# Altium PCB HDR_PATCH_00.PcbDoc
Units mm, origin at the board's own origin, x right, y up, seen from the top; angles counter-clockwise.
Board outline 50 x 50 mm, 2 copper layers (Top Layer, Bottom Layer); 3 components, 0 nets, 785 pads, 0 vias.
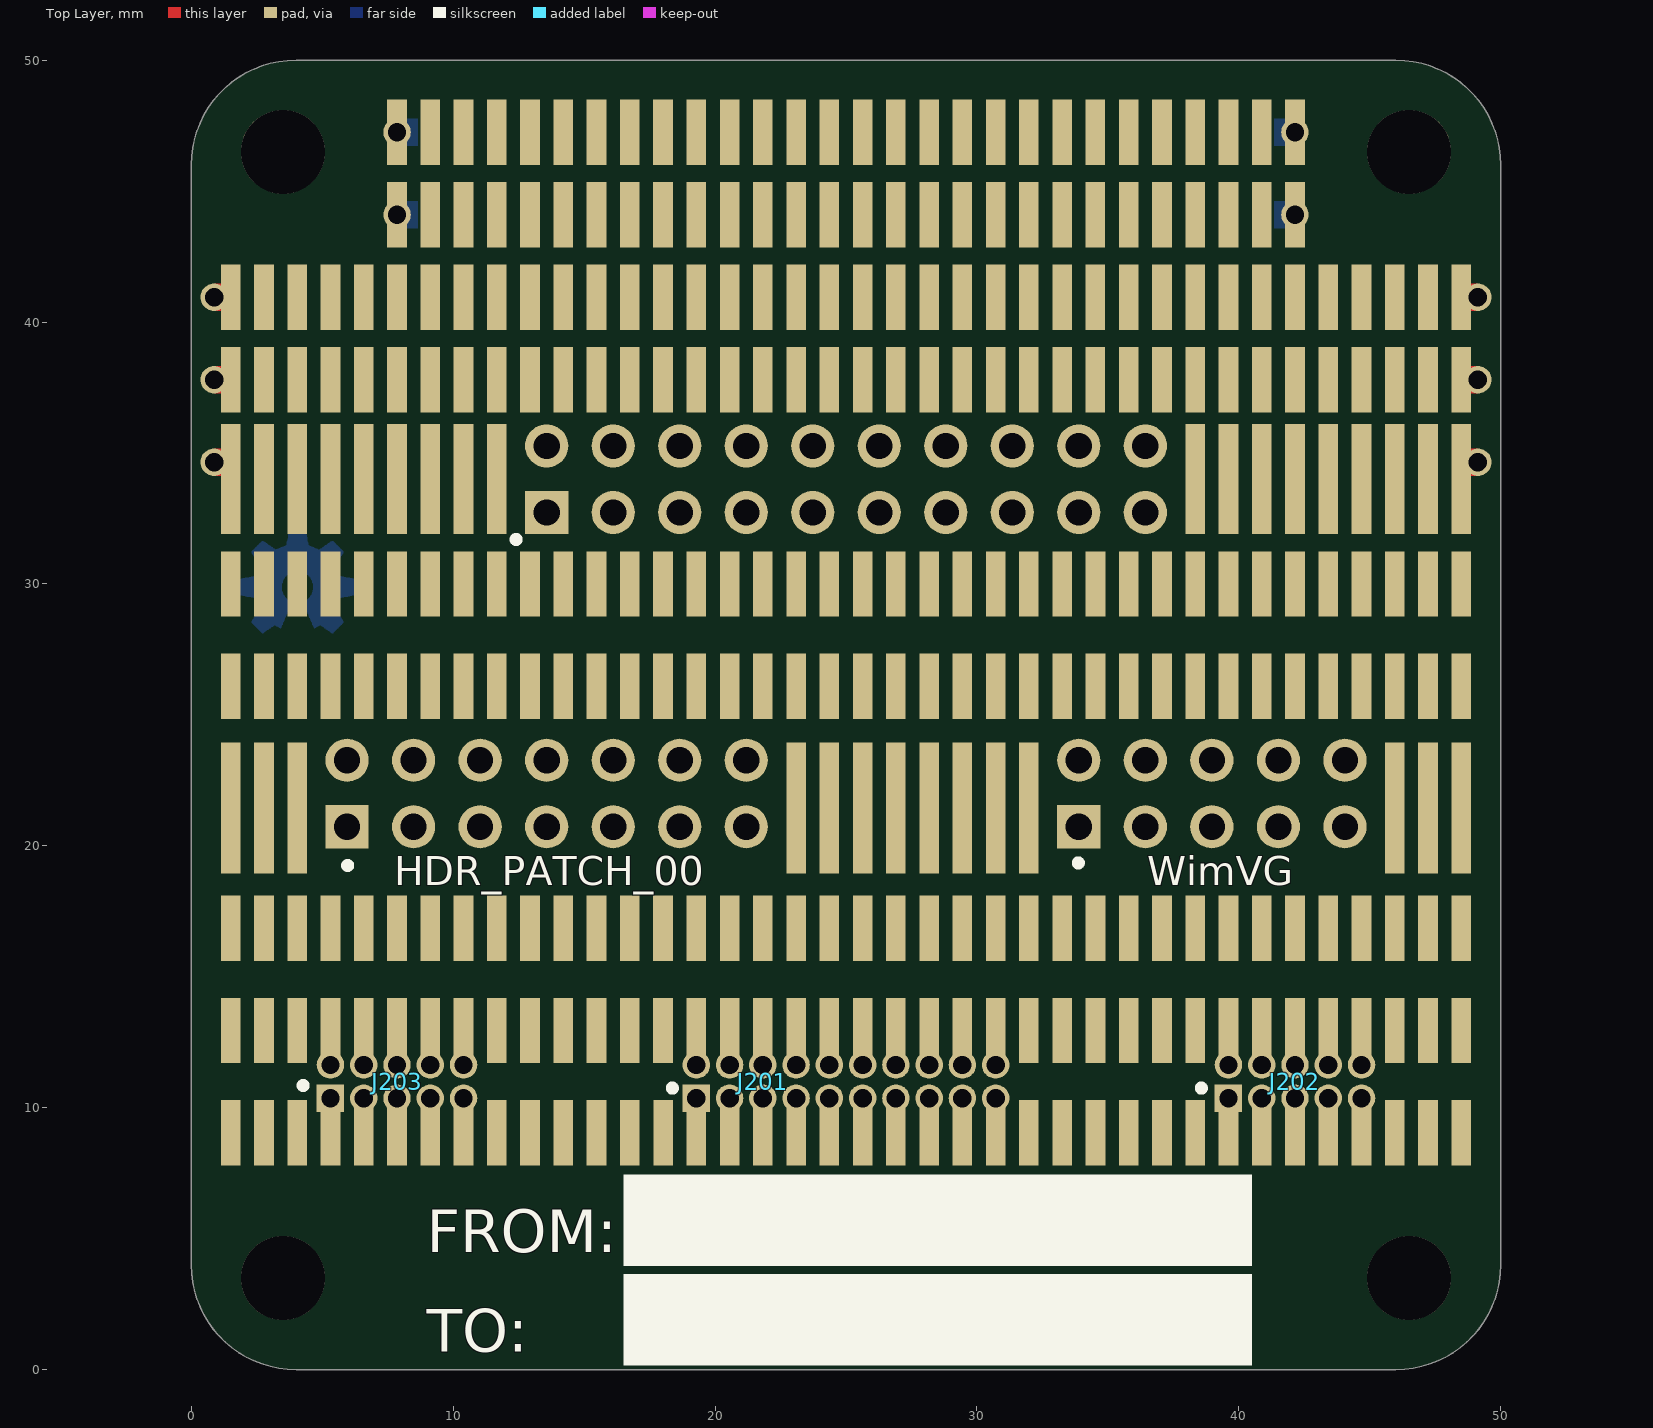
[diagram p0: Top Layer view]
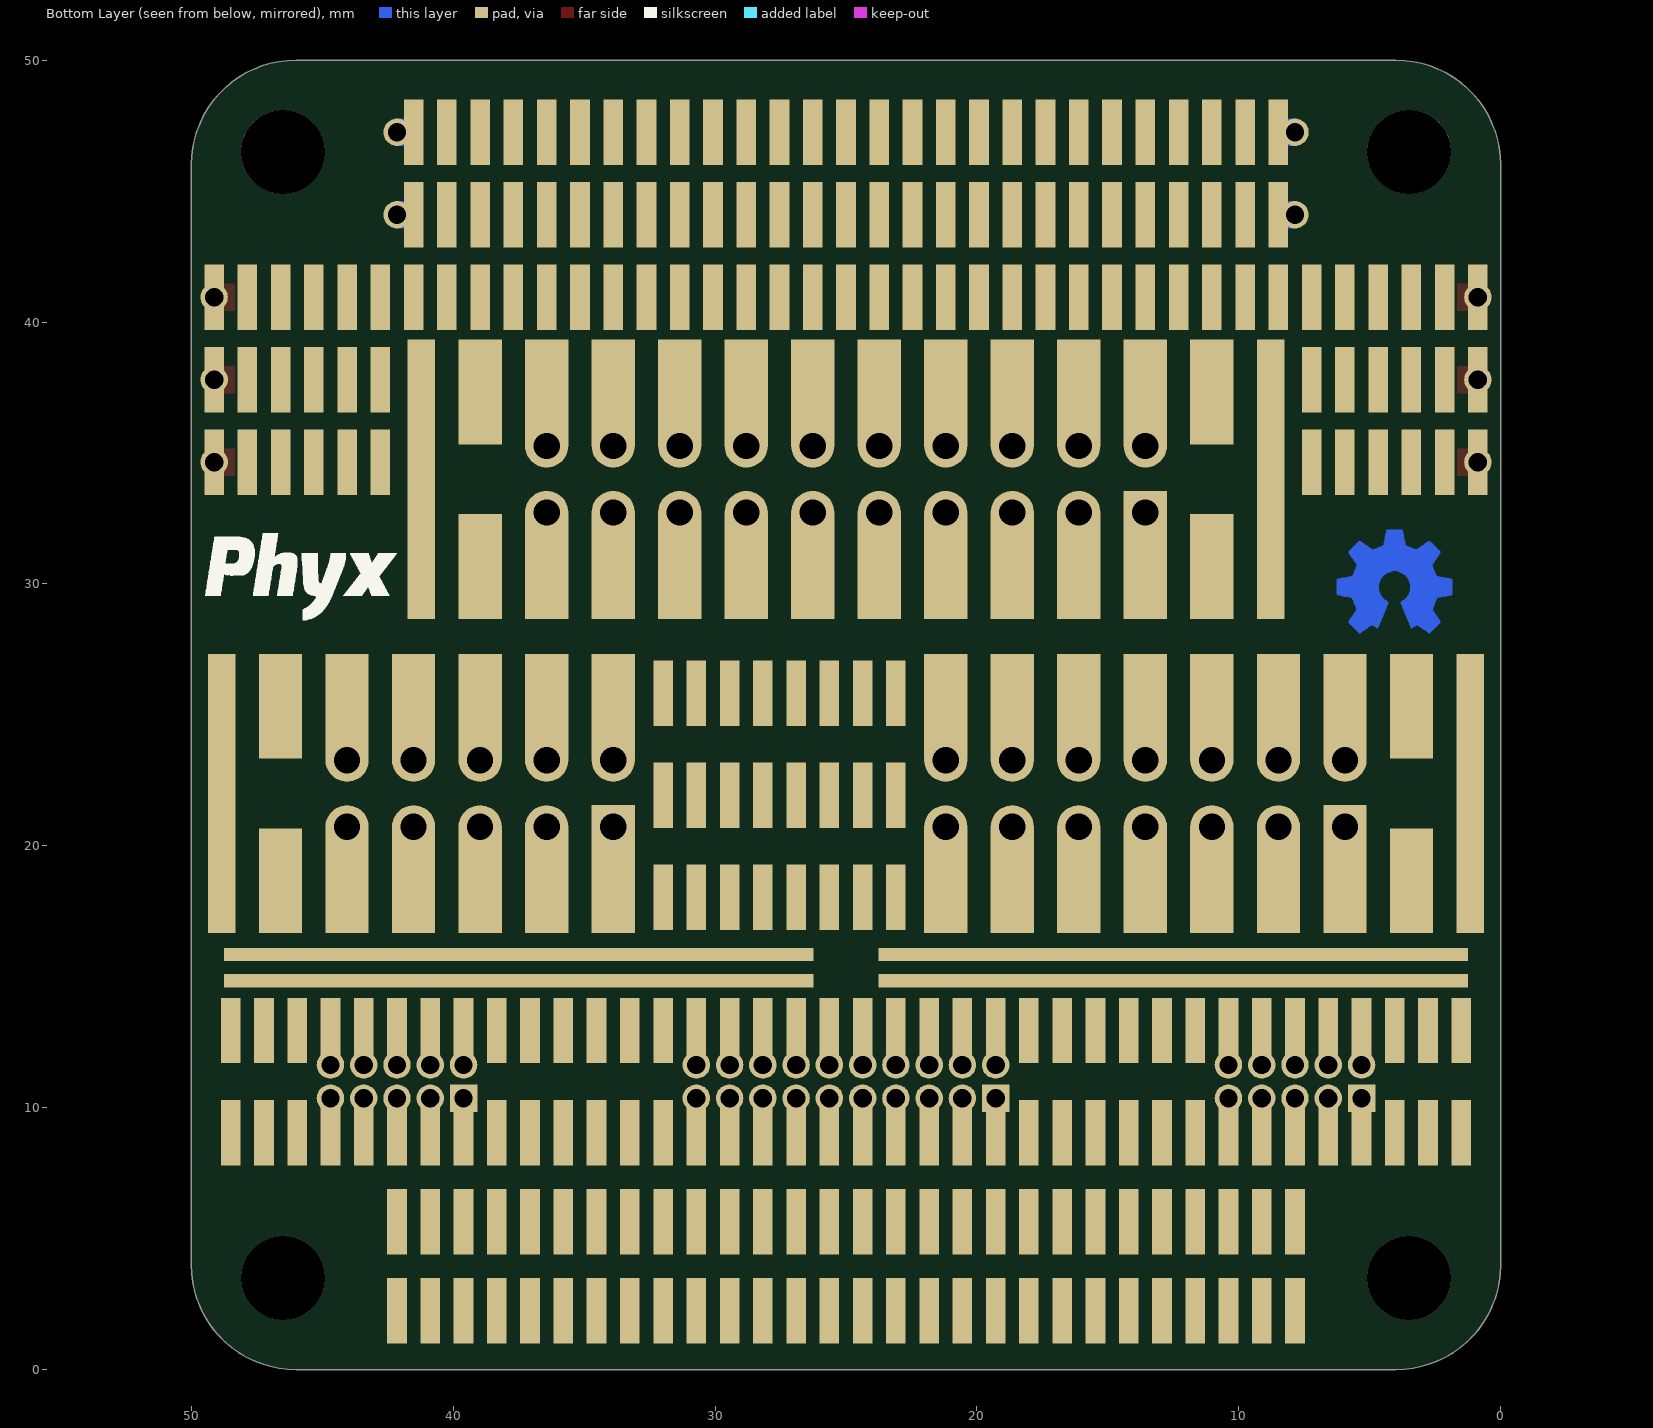
[diagram p1: Bottom Layer view, seen from below]

## Layer stack, top to bottom
Top Solder: solder mask 0.0102, Solder Resist, Dk 3.5
Top Layer: signal copper 0.0356
Dielectric1: dielectric 0.32, FR-4, Dk 4.8
Bottom Layer: signal copper 0.0356
Bottom Solder: solder mask 0.0102, Solder Resist, Dk 3.5

## Board outline
0,4 0,46 cw(c4,46) 4,50 46,50 cw(c46,46) 50,46 50,4 cw(c46,4) 46,0 4,0 cw(c4,4)

## Design rules (kind name [scope] priority, off if disabled: settings)
Clearance [All] p1: gap=0.254
PolygonConnect [All] p1: connectstyle=Relief reliefconductorwidth=0.254 reliefentries=4 polygonreliefangle="90 Angle" airgapwidth=0.254
RoutingVias [All] p1: holewidth=0.711 width=1.27 viastyle="Through Hole" minholewidth=0.711 minwidth=1.27 maxholewidth=0.711 maxwidth=1.27
SilkToSolderMaskClearance SilkscreenOverComponentPads [IsPad] p1: minsilkscreentomaskgap=0.254 clearancetoexposedcopper=TRUE
SolderMaskExpansion [All] p1: expansion=0.102
Width [All] p1: maxlimit=0.254 minlimit=0.254 preferedwidth=0.254
29 further rules are at their usual default settings.

## Components (designator, comment, footprint, x,y, rotation, side; value= is the part's Value field where it differs from the comment)
J201 "HDR 2x5 1.27 TH" HDR2X5_1.27 21.825,11 r0 top
J202 "HDR 2x5 1.27 TH" HDR2X5_1.27 42.145,11 r0 top (schematic designator J201)
J203 "HDR 2x5 1.27 TH" HDR2X5_1.27 7.855,11 r0 top (schematic designator J201)

## Footprints (in the part's own frame and the unit in brackets; to place one, negate y for a bottom-side part, rotate by r counter-clockwise, add the part's x,y. Pads: shape width x height; smd on the part's side, far side on the other; paste and mask are expansions set on the pad)
HDR2X5_1.27 [mm] "shrouded 2x5 box header 1.27mm pitch"
  rect 1.05x1.05 hole 0.7 mask+0.05: 1(-2.54,-0.635)
  round 1.05 hole 0.7 mask+0.05: 2(-2.54,0.635) 3(-1.27,-0.635) 4(-1.27,0.635) 5(0,-0.635) 6(0,0.635) 7(1.27,-0.635) 8(1.27,0.635) 9(2.54,-0.635) 10(2.54,0.635)
  body extent -6.32,-2.55 12.7,2.55, height 5.4

## Part data
J201 J202 J203: library part 150612AO003, "Header Male"

## Free pads (board coordinates)
  round 1.05 hole 0.7 paste-5: 0(0.87,40.95) 0(7.856,47.249) 0(7.857,44.1) 0(42.143,47.249) 0(42.143,44.099) 0(49.129,40.95) 1(0.871,37.8) 1(25.635,10.365) 1(25.635,11.635) 1(26.905,10.365) 1(26.905,11.635) 1(28.175,10.365) 1(28.175,11.635) 1(29.445,10.365) 1(29.445,11.635) 1(30.715,10.365) 1(30.715,11.635) 1(49.128,37.8) 2(0.871,34.65) 2(49.128,34.65)
  rect 0.75x2.5 smd far side paste-5: 0(0.871,40.95) 0(0.872,37.8) 0(0.872,34.65) 0(1.505,9.05) 0(1.505,12.95) 0(2.141,40.95) 0(2.142,37.8) 0(2.142,34.65) 0(2.775,9.05) 0(2.775,12.95) 0(3.411,40.95) 0(3.411,37.8) 0(3.412,34.65) 0(4.045,9.05) 0(4.045,12.95) 0(4.681,40.95) 0(4.681,37.8) 0(4.682,34.65) 0(5.315,12.95) 0(5.315,9.05) 0(5.951,40.95) 0(5.951,37.8) 0(5.952,34.65) 0(6.585,12.95) 0(6.585,9.05) 0(7.221,40.95) 0(7.221,37.8) 0(7.222,34.65) 0(7.855,12.95) 0(7.855,9.05) 0(7.855,2.25) 0(7.855,5.65) 0(8.491,47.249) 0(8.491,44.1) 0(8.491,40.95) 0(9.125,12.95) 0(9.125,9.05) 0(9.125,5.65) 0(9.125,2.25) 0(9.761,47.249) 0(9.761,44.1) 0(9.761,40.95) 0(10.395,12.95) 0(10.395,9.05) 0(10.395,5.65) 0(10.395,2.25) 0(11.03,47.249) 0(11.031,44.1) 0(11.031,40.95) 0(11.665,9.05) 0(11.665,5.65) 0(11.665,12.95) 0(11.665,2.25) 0(12.3,47.249) 0(12.3,44.1) 0(12.301,40.95) 0(12.935,9.05) 0(12.935,5.65) 0(12.935,12.95) 0(12.935,2.25) 0(13.57,47.249) 0(13.57,44.1) 0(13.57,40.95) 0(14.205,9.05) 0(14.205,5.65) 0(14.205,12.95) 0(14.205,2.25) 0(14.84,47.249) 0(14.84,44.1) 0(14.841,40.95) 0(15.475,9.05) 0(15.475,5.65) 0(15.475,12.95) 0(15.475,2.25) 0(16.11,47.249) 0(16.11,44.1) 0(16.11,40.95) 0(16.745,9.05) 0(16.745,5.65) 0(16.745,12.95) 0(16.745,2.25) 0(17.38,47.249) 0(17.38,44.1) 0(17.38,40.95) 0(18.015,9.05) 0(18.015,5.65) 0(18.015,12.95) 0(18.015,2.25) 0(18.65,47.249) 0(18.65,44.1) 0(18.65,40.95) 0(19.285,12.95) 0(19.285,9.05) 0(19.285,5.65) 0(19.285,2.25) 0(19.92,47.249) 0(19.92,44.1) 0(19.92,40.95) 0(20.555,12.95) 0(20.555,9.05) 0(20.555,5.65) 0(20.555,2.25) 0(21.19,47.249) 0(21.19,44.1) 0(21.19,40.95) 0(21.825,12.95) 0(21.825,9.05) 0(21.825,5.65) 0(21.825,2.25) 0(22.46,47.249) 0(22.46,44.1) 0(22.46,40.95) 0(23.095,25.83) 0(23.095,21.93) 0(23.095,12.95) 0(23.095,18.03) 0(23.095,9.05) 0(23.095,5.65) 0(23.095,2.25) 0(23.73,47.249) 0(23.73,44.1) 0(23.73,40.95) 0(24.365,25.83) 0(24.365,21.93) 0(24.365,12.95) 0(24.365,18.03) 0(24.365,9.05) 0(24.365,5.65) 0(24.365,2.25) 0(25,47.249) 0(25,44.1) 0(25,40.95) 0(25.635,25.83) 0(25.635,21.93) 0(25.635,12.95) 0(25.635,18.03) 0(25.635,9.05) 0(25.635,5.65) 0(25.635,2.25) 0(26.27,47.249) 0(26.27,44.1) 0(26.27,40.95) 0(26.905,25.83) 0(26.905,21.93) 0(26.905,12.95) 0(26.905,18.03) 0(26.905,9.05) 0(26.905,5.65) 0(26.905,2.25) 0(27.54,47.249) 0(27.54,44.1) 0(27.54,40.95) 0(28.175,25.83) 0(28.175,21.93) 0(28.175,12.95) 0(28.175,18.03) 0(28.175,9.05) 0(28.175,5.65) 0(28.175,2.25) 0(28.81,47.249) 0(28.81,44.1) 0(28.81,40.95) 0(29.445,25.83) 0(29.445,21.93) 0(29.445,12.95) 0(29.445,18.03) 0(29.445,9.05) 0(29.445,5.65) 0(29.445,2.25) 0(30.08,47.249) 0(30.08,44.1) 0(30.08,40.95) 0(30.715,25.83) 0(30.715,21.93) 0(30.715,12.95) 0(30.715,18.03) 0(30.715,9.05) 0(30.715,5.65) 0(30.715,2.25) 0(31.35,47.249) 0(31.35,44.1) 0(31.35,40.95) 0(31.985,12.95) 0(31.985,18.03) 0(31.985,9.05) 0(31.985,5.65) 0(31.985,25.83) 0(31.985,2.25) 0(31.985,21.93) 0(32.619,47.249) 0(32.62,44.099) 0(32.62,40.95) 0(33.255,12.95) 0(33.255,9.05) 0(33.255,5.65) 0(33.255,2.25) 0(33.889,47.249) 0(33.889,44.099) 0(33.89,40.95) 0(34.525,12.95) 0(34.525,9.05) 0(34.525,5.65) 0(34.525,2.25) 0(35.159,47.249) 0(35.159,44.099) 0(35.159,40.95) 0(35.795,12.95) 0(35.795,9.05) 0(35.795,5.65) 0(35.795,2.25) 0(36.429,47.249) 0(36.429,44.099) 0(36.429,40.95) 0(37.065,12.95) 0(37.065,9.05) 0(37.065,5.65) 0(37.065,2.25) 0(37.699,47.249) 0(37.699,44.099) 0(37.699,40.95) 0(38.335,12.95) 0(38.335,9.05) 0(38.335,5.65) 0(38.335,2.25) 0(38.969,47.249) 0(38.969,44.099) 0(38.969,40.95) 0(39.605,12.95) 0(39.605,9.05) 0(39.605,5.65) 0(39.605,2.25) 0(40.239,44.099) 0(40.239,47.249) 0(40.239,40.95) 0(40.875,12.95) 0(40.875,9.05) 0(40.875,5.65) 0(40.875,2.25) 0(41.509,47.249) 0(41.509,44.099) 0(41.509,40.95) 0(42.145,12.95) 0(42.145,5.65) 0(42.145,2.25) 0(42.145,9.05) 0(42.778,34.65) 0(42.779,37.8) 0(42.779,40.95) 0(43.415,12.95) 0(43.415,9.05) 0(44.048,34.65) 0(44.049,37.8) 0(44.049,40.95) 0(44.685,12.95) 0(44.685,9.05) 0(45.318,34.65) 0(45.319,37.8) 0(45.319,40.95) 0(45.955,12.95) 0(45.955,9.05) 0(46.588,34.65) 0(46.589,37.8) 0(46.589,40.95) 0(47.225,12.95) 0(47.225,9.05) 0(47.858,34.65) 0(47.858,37.8) 0(47.859,40.95) 0(48.495,12.95) 0(48.495,9.05) 0(49.128,34.65) 0(49.128,37.8) 0(49.129,40.95)
  rect 1.05x10.67 smd far side paste-5: 0(1.17,22) 0(8.79,34) 0(41.21,34) 0(48.83,22)
  rect 0.75x5 smd paste-5: 0(1.505,21.45) 0(2.775,21.45) 0(4.045,21.45) 0(23.095,21.45) 0(24.365,21.45) 0(25.635,21.45) 0(26.905,21.45) 0(28.175,21.45) 0(29.445,21.45) 0(30.715,21.45) 0(31.985,21.45) 0(45.955,21.45) 0(47.225,21.45) 0(48.495,21.45)
  rect 0.75x2.5 smd paste-5: 0(1.505,30) 0(1.505,26.1) 0(1.505,40.95) 0(1.505,16.85) 0(1.505,37.8) 0(1.505,12.95) 0(1.505,9.05) 0(2.774,30) 0(2.775,26.1) 0(2.775,40.95) 0(2.775,16.85) 0(2.775,37.8) 0(2.775,12.95) 0(2.775,9.05) 0(4.044,30) 0(4.044,26.1) 0(4.044,40.95) 0(4.045,16.85) 0(4.045,37.8) 0(4.045,12.95) 0(4.045,9.05) 0(5.315,40.95) 0(5.315,30) 0(5.315,16.85) 0(5.315,26.1) 0(5.315,37.8) 0(5.315,12.95) 0(5.315,9.05) 0(6.584,40.95) 0(6.585,30) 0(6.585,16.85) 0(6.585,26.1) 0(6.585,37.8) 0(6.585,12.95) 0(6.585,9.05) 0(7.854,40.95) 0(7.854,47.249) 0(7.855,44.099) 0(7.855,30) 0(7.855,37.8) 0(7.855,16.85) 0(7.855,26.1) 0(7.855,12.95) 0(7.855,9.05) 0(9.124,47.249) 0(9.124,44.099) 0(9.125,40.95) 0(9.125,37.8) 0(9.125,30) 0(9.125,16.85) 0(9.125,26.1) 0(9.125,12.95) 0(9.125,9.05) 0(10.394,47.249) 0(10.394,44.099) 0(10.394,40.95) 0(10.395,37.8) 0(10.395,30) 0(10.395,16.85) 0(10.395,26.1) 0(10.395,12.95) 0(10.395,9.05) 0(11.664,47.249) 0(11.664,44.099) 0(11.664,40.95) 0(11.664,37.8) 0(11.665,30) 0(11.665,16.85) 0(11.665,26.1) 0(11.665,12.95) 0(11.665,9.05) 0(12.934,47.249) 0(12.934,44.099) 0(12.934,40.95) 0(12.934,37.8) 0(12.935,30) 0(12.935,16.85) 0(12.935,26.1) 0(12.935,12.95) 0(12.935,9.05) 0(14.204,47.249) 0(14.204,44.099) 0(14.204,40.95) 0(14.204,37.8) 0(14.205,30) 0(14.205,16.85) 0(14.205,26.1) 0(14.205,12.95) 0(14.205,9.05) 0(15.474,47.249) 0(15.474,44.099) 0(15.474,40.95) 0(15.474,37.8) 0(15.475,30) 0(15.475,16.85) 0(15.475,26.1) 0(15.475,12.95) 0(15.475,9.05) 0(16.744,47.249) 0(16.744,44.099) 0(16.744,40.95) 0(16.744,37.8) 0(16.745,30) 0(16.745,16.85) 0(16.745,26.1) 0(16.745,12.95) 0(16.745,9.05) 0(18.014,47.249) 0(18.014,44.099) 0(18.014,40.95) 0(18.014,37.8) 0(18.015,30) 0(18.015,16.85) 0(18.015,26.1) 0(18.015,12.95) 0(18.015,9.05) 0(19.284,47.249) 0(19.284,44.099) 0(19.285,40.95) 0(19.285,37.8) 0(19.285,30) 0(19.285,16.85) 0(19.285,26.1) 0(19.285,12.95) 0(19.285,9.05) 0(20.554,47.249) 0(20.554,44.099) 0(20.554,40.95) 0(20.555,37.8) 0(20.555,30) 0(20.555,16.85) 0(20.555,26.1) 0(20.555,12.95) 0(20.555,9.05) 0(21.824,47.249) 0(21.824,44.099) 0(21.824,40.95) 0(21.825,37.8) 0(21.825,30) 0(21.825,16.85) 0(21.825,26.1) 0(21.825,12.95) 0(21.825,9.05) 0(23.094,47.249) 0(23.094,44.099) 0(23.095,40.95) 0(23.095,37.8) 0(23.095,30) 0(23.095,16.85) 0(23.095,26.1) 0(23.095,12.95) 0(23.095,9.05) 0(24.364,47.249) 0(24.364,44.099) 0(24.364,40.95) 0(24.365,37.8) 0(24.365,30) 0(24.365,16.85) 0(24.365,26.1) 0(24.365,12.95) 0(24.365,9.05) 0(25.634,47.249) 0(25.634,44.099) 0(25.634,40.95) 0(25.635,37.8) 0(25.635,30) 0(25.635,16.85) 0(25.635,26.1) 0(25.635,12.95) 0(25.635,9.05) 0(26.904,47.249) 0(26.904,44.099) 0(26.904,40.95) 0(26.905,37.8) 0(26.905,30) 0(26.905,16.85) 0(26.905,26.1) 0(26.905,12.95) 0(26.905,9.05) 0(28.174,47.249) 0(28.174,44.099) 0(28.174,40.95) 0(28.175,37.8) 0(28.175,30) 0(28.175,16.85) 0(28.175,26.1) 0(28.175,12.95) 0(28.175,9.05) 0(29.444,47.249) 0(29.444,44.099) 0(29.444,40.95) 0(29.445,37.8) 0(29.445,30) 0(29.445,16.85) 0(29.445,26.1) 0(29.445,12.95) 0(29.445,9.05) 0(30.714,47.249) 0(30.714,44.099) 0(30.714,40.95) 0(30.715,37.8) 0(30.715,30) 0(30.715,16.85) 0(30.715,26.1) 0(30.715,12.95) 0(30.715,9.05) 0(31.984,47.249) 0(31.984,44.099) 0(31.984,40.95) 0(31.984,37.8) 0(31.985,30) 0(31.985,16.85) 0(31.985,26.1) 0(31.985,12.95) 0(31.985,9.05) 0(33.254,47.249) 0(33.254,44.099) 0(33.254,40.95) 0(33.254,37.8) 0(33.255,30) 0(33.255,16.85) 0(33.255,26.1) 0(33.255,12.95) 0(33.255,9.05) 0(34.524,47.249) 0(34.524,44.099) 0(34.524,40.95) 0(34.524,37.8) 0(34.525,30) 0(34.525,16.85) 0(34.525,26.1) 0(34.525,12.95) 0(34.525,9.05) 0(35.794,47.249) 0(35.794,44.099) 0(35.794,40.95) 0(35.794,37.8) 0(35.795,30) 0(35.795,16.85) 0(35.795,26.1) 0(35.795,12.95) 0(35.795,9.05) 0(37.064,47.249) 0(37.064,44.099) 0(37.064,40.95) 0(37.064,37.8) 0(37.065,30) 0(37.065,16.85) 0(37.065,26.1) 0(37.065,12.95) 0(37.065,9.05) 0(38.334,47.249) 0(38.334,44.099) 0(38.334,40.95) 0(38.335,30) 0(38.335,16.85) 0(38.335,26.1) 0(38.335,37.8) 0(38.335,12.95) 0(38.335,9.05) 0(39.605,40.95) 0(39.605,37.8) 0(39.605,30) 0(39.605,16.85) 0(39.605,26.1) 0(39.605,12.95) 0(39.605,9.05) 0(39.605,44.099) 0(39.605,47.249) 0(40.874,47.249) 0(40.874,44.099) 0(40.874,40.95) 0(40.875,37.8) 0(40.875,30) 0(40.875,16.85) 0(40.875,26.1) 0(40.875,12.95) 0(40.875,9.05) 0(42.144,47.249) 0(42.144,44.099) 0(42.144,40.95) 0(42.145,30) 0(42.145,16.85) 0(42.145,26.1) 0(42.145,37.8) 0(42.145,12.95) 0(42.145,9.05) 0(43.415,40.95) 0(43.415,37.8) 0(43.415,30) 0(43.415,16.85) 0(43.415,26.1) 0(43.415,12.95) 0(43.415,9.05) 0(44.684,40.95) 0(44.685,37.8) 0(44.685,30) 0(44.685,16.85) 0(44.685,26.1) 0(44.685,12.95) 0(44.685,9.05) 0(45.955,40.95) 0(45.955,9.05) 0(45.955,26.1) 0(45.955,37.8) 0(45.955,12.95) 0(45.955,30) 0(45.955,16.85) 0(47.225,40.95) 0(47.225,9.05) 0(47.225,26.1) 0(47.225,37.8) 0(47.225,12.95) 0(47.225,30) 0(47.225,16.85) 0(48.495,40.95) 0(48.495,9.05) 0(48.495,26.1) 0(48.495,37.8) 0(48.495,12.95) 0(48.495,30) 0(48.495,16.85)
  rect 0.75x4.2 smd paste-5: 0(1.505,34) 0(2.775,34) 0(4.045,34) 0(5.315,34) 0(6.585,34) 0(7.855,34) 0(9.125,34) 0(10.394,34) 0(11.664,34) 0(38.335,34) 0(39.605,34) 0(40.874,34) 0(42.145,34) 0(43.415,34) 0(44.685,34) 0(45.955,34) 0(47.225,34) 0(48.495,34)
  rect 1.65x4 smd far side paste-5: 0(3.41,18.665) 0(3.41,25.335) 0(5.95,18.665) 0(5.95,25.335) 0(8.49,18.665) 0(8.49,25.335) 0(11.03,18.665) 0(11.03,25.335) 0(11.03,30.665) 0(11.03,37.335) 0(13.57,18.665) 0(13.57,25.335) 0(13.57,30.665) 0(13.57,37.335) 0(16.11,18.665) 0(16.11,25.335) 0(16.11,30.665) 0(16.11,37.335) 0(18.65,18.665) 0(18.65,25.335) 0(18.65,30.665) 0(18.65,37.335) 0(21.19,18.665) 0(21.19,25.335) 0(21.19,30.665) 0(21.19,37.335) 0(23.73,30.665) 0(23.73,37.335) 0(26.27,30.665) 0(26.27,37.335) 0(28.81,30.665) 0(28.81,37.335) 0(31.35,30.665) 0(31.35,37.335) 0(33.89,30.665) 0(33.89,37.335) 0(33.89,18.665) 0(33.89,25.335) 0(36.43,30.665) 0(36.43,37.335) 0(36.43,18.665) 0(36.43,25.335) 0(38.97,30.665) 0(38.97,37.335) 0(38.97,18.665) 0(38.97,25.335) 0(41.51,18.665) 0(41.51,25.335) 0(44.05,18.665) 0(44.05,25.335) 0(46.59,18.665) 0(46.59,25.335)
  rect 22.5x0.5 smd far side paste-5: 0(12.5,14.85) 0(12.5,15.85) 0(37.5,14.85) 0(37.5,15.85)
  rect 1.65x1.65 hole 1: 1(5.95,20.73) 1(13.57,32.73) 1(33.89,20.73)
  round 1.65 hole 1: 2(5.95,23.27) 2(13.57,35.27) 2(33.89,23.27) 3(8.49,20.73) 3(16.11,32.73) 3(36.43,20.73) 4(8.49,23.27) 4(16.11,35.27) 4(36.43,23.27) 5(11.03,20.73) 5(18.65,32.73) 5(38.97,20.73) 6(11.03,23.27) 6(18.65,35.27) 6(38.97,23.27) 7(13.57,20.73) 7(21.19,32.73) 7(41.51,20.73) 8(13.57,23.27) 8(21.19,35.27) 8(41.51,23.27) 9(16.11,20.73) 9(23.73,32.73) 9(44.05,20.73) 10(16.11,23.27) 10(23.73,35.27) 10(44.05,23.27) 11(18.65,20.73) 11(26.27,32.73) 12(18.65,23.27) 12(26.27,35.27) 13(21.19,20.73) 13(28.81,32.73) 14(21.19,23.27) 14(28.81,35.27) 15(31.35,32.73) 16(31.35,35.27) 17(33.89,32.73) 18(33.89,35.27) 19(36.43,32.73) 20(36.43,35.27)
  round 3.2 hole 3.2 unplated paste-5 mask+1.8: MH(3.5,3.5) MH(3.5,46.5) MH(46.5,3.5) MH(46.5,46.5)

## Nets (pads, with @x,y where several pads share a name; then routed paths per layer and width w, separated by ;. In a path a pad name is that pad's centre, name@x,y a point inside that pad or via, vN(x,y) a via of type N, cw(c..) or ccw(c..) an arc to the next point about the centre after c; other vN are vias at no path point)
pads on no net: J201.1 J201.2 J201.3 J201.4 J201.5 J201.6 J201.7 J201.8 J201.9 J201.10 J202.1 J202.2 J202.3 J202.4 J202.5 J202.6 J202.7 J202.8 J202.9 J202.10 J203.1 J203.2 J203.3 J203.4 J203.5 J203.6 J203.7 J203.8 J203.9 J203.10

## Keep-outs
Keep-Out Layer:
  text ".Layer_Name" at 305.5,-28 h3.5

## Other copper
Top Layer:
  region: 1.674,41.475 0.874,41.475 0.874,40.425 1.674,40.425
  region: 1.675,38.325 0.875,38.325 0.875,37.275 1.675,37.275
  region: 1.675,35.175 0.875,35.175 0.875,34.125 1.675,34.125
  rectangle: 48.324,34.125 49.124,35.175
  rectangle: 48.325,37.275 49.125,38.325
  rectangle: 48.325,40.425 49.125,41.475
  text ".Layer_Name" at 305.5,-28 h3.5
Bottom Layer:
  region: 8.66,47.774 7.86,47.774 7.86,46.724 8.66,46.724
  region: 8.66,44.624 7.86,44.624 7.86,43.574 8.66,43.574
  rectangle: 41.339,46.725 42.139,47.775
  rectangle: 41.34,43.575 42.14,44.625
  region: 1849 vertices and 1 holes, not listed, extent 1.859,28.127 6.255,32.079
  text ".Layer_Name" at 305.5,-28 h3.5

## Silkscreen, mask and mechanical layers (free items; w line width, h text height)
Top Overlay:
  circle w0.25: c4.27,10.85 r0.125
  circle w0.25: c18.37,10.75 r0.125
  circle w0.25: c38.57,10.75 r0.125
  circle w0.25: c33.87,19.35 r0.125
  circle w0.25: c5.97,19.25 r0.125
  circle w0.25: c12.4,31.7 r0.125
  rectangle: 16.5,0.15 40.5,3.65
  rectangle: 16.5,3.95 40.5,7.45
  text "HDR_PATCH_00" at 7.75,18.5 h1.1
  text "WimVG" at 36.5,18.5 h1.1
  text "FROM:" at 9,3.95 h2.8
  text "TO:" at 9,0.15 h2.8
  text ".Layer_Name" at 305.5,-28 h3.5
Bottom Overlay:
  drawing of 4 lines, arcs and shapes, not listed
  text ".Layer_Name" at 305.5,-28 h3.5
Top Paste:
  text ".Layer_Name" at 305.5,-28 h3.5
Bottom Paste:
  text ".Layer_Name" at 305.5,-28 h3.5
Top Solder:
  text ".Layer_Name" at 305.5,-28 h3.5
Bottom Solder:
  text ".Layer_Name" at 305.5,-28 h3.5
Drill Guide:
  text ".Layer_Name" at 305.5,-28 h3.5
3D Symbols:
  text ".Layer_Name" at 305.5,-28 h3.5
Outline:
  the board outline again, w0.2
Comments:
  text ".Layer_Name" at 305.5,-28 h3.5
Fabrication:
  text ".Layer_Name" at 305.5,-28 h3.5
Placebound Top:
  text ".Layer_Name" at 305.5,-28 h3.5
Placebound Bottom:
  text ".Layer_Name" at 305.5,-28 h3.5
Frame:
  drawing of 15 lines, arcs and shapes, not listed
  text "Document" at 301,-13 h2
  text ".PCB_TITLE" at 302.5,-18.5 h4
  text "Layer Name" at 301,-23 h2
  text "Date" at 301,-33 h2
  text "Rev" at 341,-33 h2
  text ".Print_Date" at 304,-38.5 h3.5
  text ".PCB_REV" at 345.5,-38.5 h4
  text "Desginer" at 251,-43 h2
  text "Document" at 301,-43 h2
  text ".Pcb_File_Name_No_Path" at 302.5,-48 h1.5
  text ".PCB_ENGINEER" at 255.5,-48.5 h4
Assembly Top:
  text ".Layer_Name" at 305.5,-28 h3.5
Assembly Bottom:
  text ".Layer_Name" at 305.5,-28 h3.5
Drill Drawing:
  text ".legend" at 103,7 h4

## Dimensions
4,50 to 0,0 on Fabrication
0,0 to 50,0 on Fabrication